# EAGLE board power mux-v5 (EAGLE 6.5.0)
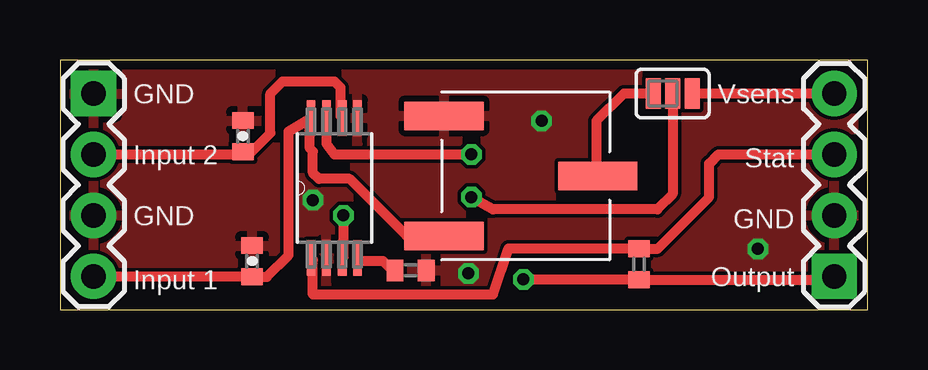
[diagram p0: board, top side]
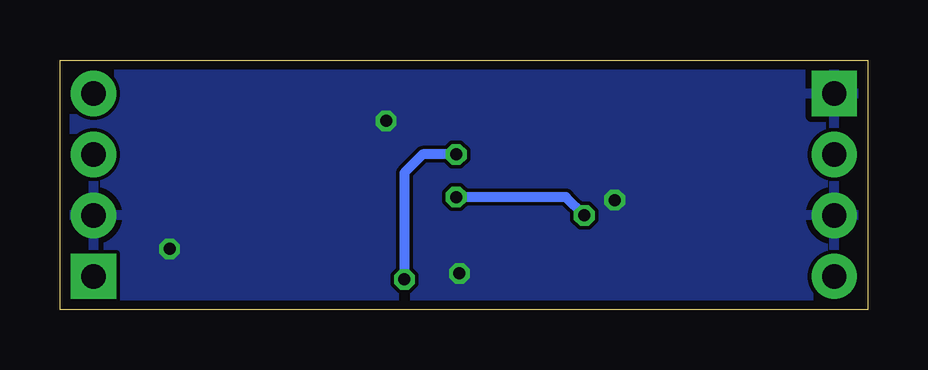
[diagram p1: board, bottom side, seen from below]

Size 33.66 x 10.41 mm. Coordinates in mm from the lower left corner, seen from the top.
Outline: 0,0 33.66,0 33.66,10.41 0,10.41 0,0
Copper layers (1*16): Top 0.0356mm / dielectric 1.5011mm / Bottom 0.0356mm
Design rules "LaenPCBOrder": minimum track width 6mil, minimum drill 13mil, track to track 6mil, track to pad 6mil, pad to pad 6mil, via to via 6mil, smd to smd 6mil, copper to edge 15mil, drill to drill 6mil, minimum pad ring 7mil, minimum via ring 7mil, stop-mask expansion 3mil, vias tented up to drill 0mil, thermal gap 10mil

## Footprints (pad centres in the part's own frame; a part is rotated, then mirrored left to right if it is on the bottom)
0402-CAP = smd 0.7 x 0.9: 1 -0.65,0; 2 0.65,0
1X04 = drill 1.016 pad 1.88 square: 1 0,0 | drill 1.016 pad 1.88: 2 2.54,0; 3 5.08,0; 4 7.62,0
R0402 = smd 0.7 x 0.9: 1 -0.65,0; 2 0.65,0
SJ_3_PASTE1&2 = smd 0.635 x 1.27: 1 -0.813,0; 2 0,0; 3 0.813,0
SOP65P640X120-8N = smd 1.473 x 0.356: 1 -2.921,0.965; 2 -2.921,0.33; 3 -2.921,-0.33; 4 -2.921,-0.965; 5 2.921,-0.965; 6 2.921,-0.33; 7 2.921,0.33; 8 2.921,0.965
TRIMPOT-10K = smd 1.19 x 3.3: 1 -2.5,-3.3; 2 2.5,-3.3; 3 0,3.1

## Placement (x,y rotation side)
C3  1uf  [0402-CAP]  7.62,7.24 90 top
C4  1uf  [0402-CAP]  8,2.03 270 top
JP1  [1X04]  32.26,1.4 90 top
JP2  [1X04]  1.4,9.02 270 top
R2  400  [R0402]  14.61,1.65 180 top
R3  4.7k  [R0402]  24.13,1.9 90 top
SJ1  [SJ_3_PASTE1&2]  25.53,9.02 0 top
U1  TPS2113APWR  [SOP65P640X120-8N]  11.43,5.08 90 top
U$2  TRIMPOT-10K  [TRIMPOT-10K]  19.3,5.59 270 top

## Library data of the parts
C3 C4 = SparkFun-Capacitors
JP1 JP2 = SparkFun-Connectors
R2 R3 = resistor
SJ1 = SparkFun-Passives
U1 = Texas Instruments_By_element14_Batch_1; MPN: TPS2113APWR; OC_FARNELL: 1757288; OC_NEWARK: 01J0961; PACKAGE: TSSOP-8; SUPPLIER: TEXAS INSTRUMENTS
U$2 = Richards

## Nets
GND: C3.2 C4.1 JP1.2 JP2.1 JP2.3 R2.1 U1.2 U1.5 U$2.1
ILIM: R2.2 U1.4
IN1: C4.2 JP2.4 U1.8 U$2.2
IN2: C3.1 JP2.2 U1.6
N$2: SJ1.1 U$2.3
OUT: JP1.1 R3.1 U1.7
SELECT: JP1.4 SJ1.3
STAT: JP1.3 R3.2 U1.1
VSENS: SJ1.2 U1.3

## Tracks (layer width: path | path; a pad name or v marks a point on that pad's centre or on a via)
GND  (via drill 0.5)
  other vias: 20.07,7.87 17.02,1.52 29.08,2.54 10.54,4.57
  pour Bottom: 0,10.29 0,0.13 33.66,0.13 33.66,10.29
  pour Top: 0,10.41 0,0 33.66,0.13 33.66,10.54
ILIM
  Top 0.406: R2.2 13.96,1.54 13.46,2.03 12.52,2.03 U1.4
IN1
  Top 0.406: JP2.4 7.99,1.4 C4.2 8.62,1.38 9.53,2.29 9.53,7.44 U1.8 10.41,7.95 10.41,6.73 10.54,6.6 10.54,5.71 10.79,5.46 12.06,5.46 14.44,3.09 U$2.2
IN2
  Top 0.406: JP2.2 7.61,6.48 C3.1 7.99,6.59 8.76,7.37 8.76,9.02 9.27,9.52 11.43,9.52 11.68,9.27 11.68,8.08 U1.6
N$2
  Top 0.406: SJ1.1 23.5,9.02 22.35,7.87 22.35,5.64 U$2.3
OUT  (via drill 0.5)
  Top 0.406: U1.7 11.1,6.93 11.43,6.48 v17.14,6.48 | v19.3,1.27 24.11,1.27 R3.1 32.12,1.25 JP1.1
  Bottom 0.406: v17.14,6.48 18.54,6.48 19.3,5.71 v19.3,1.27
SELECT
  Top 0.406: JP1.4 SJ1.3
STAT
  Top 0.406: JP1.3 27.43,6.48 27.05,6.1 27.05,4.7 24.91,2.55 R3.2 18.68,2.55 18.03,0.63 10.54,0.63 10.54,2.08 U1.1
VSENS  (via drill 0.5)
  Top 0.406: SJ1.2 25.53,4.83 24.89,4.19 18.03,4.19 v17.14,4.7 | v11.81,3.94 11.81,2.21 U1.3
  Bottom 0.406: v11.81,3.94 12.57,4.7 v17.14,4.7

## Text on the board
tPlace: GND | Vsens | Input 2 | Stat | GND | GND | Input 1 | Output